# EAGLE board ServoShield_v2_1 (EAGLE 7.5.0)
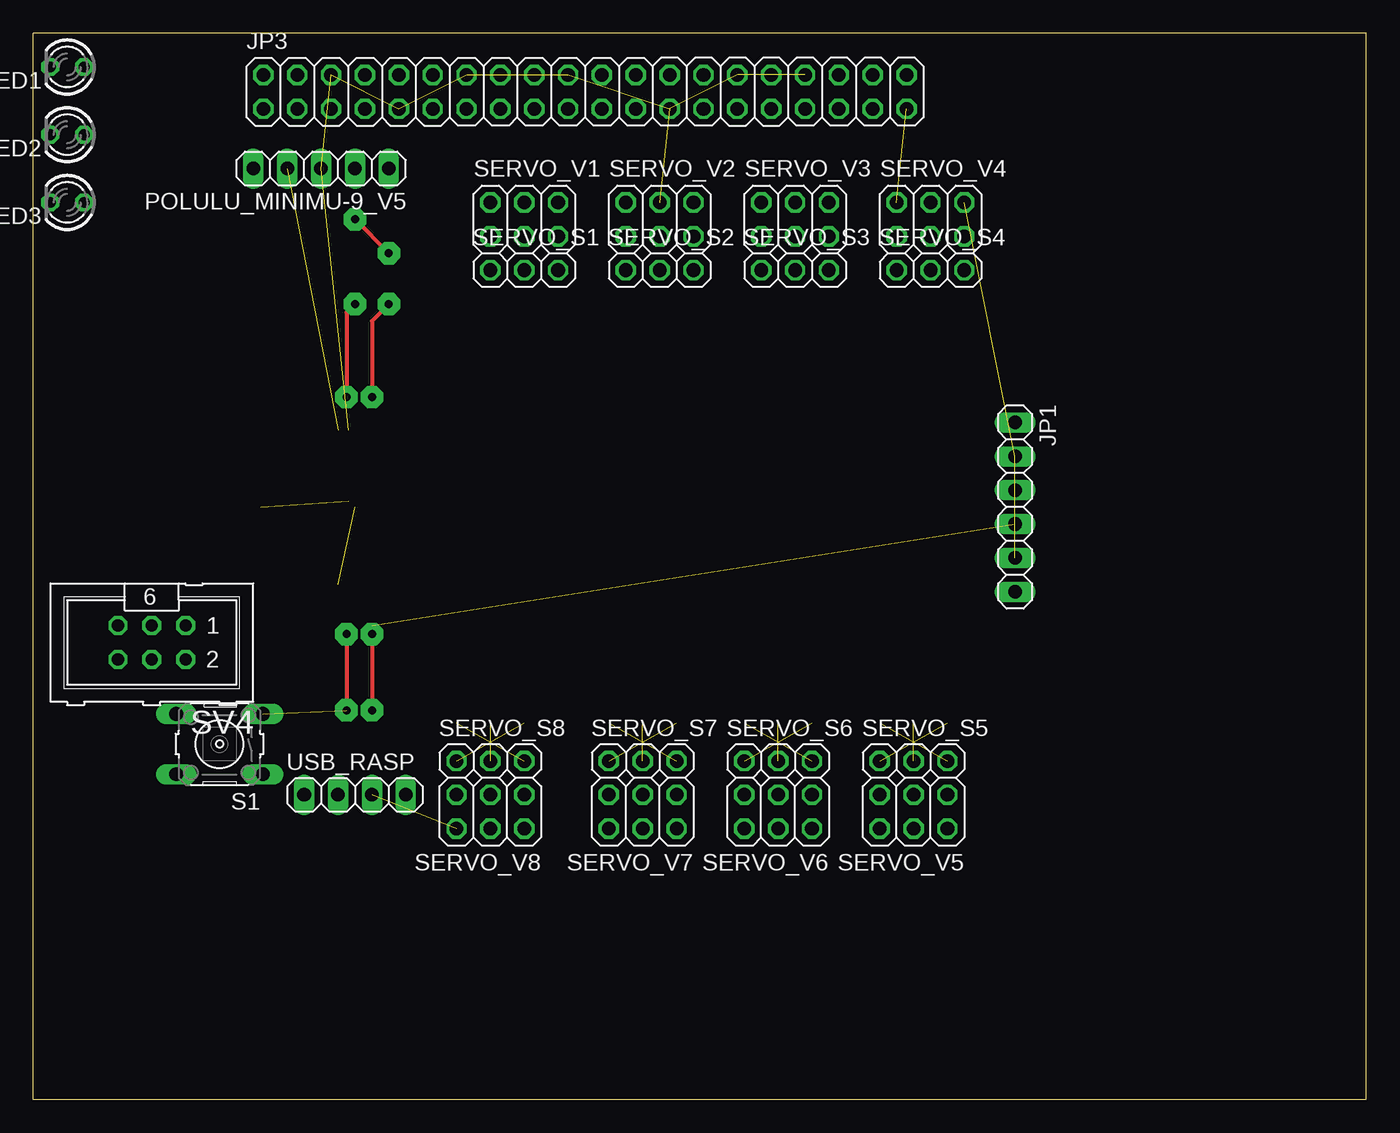
[diagram p0: board, top side]
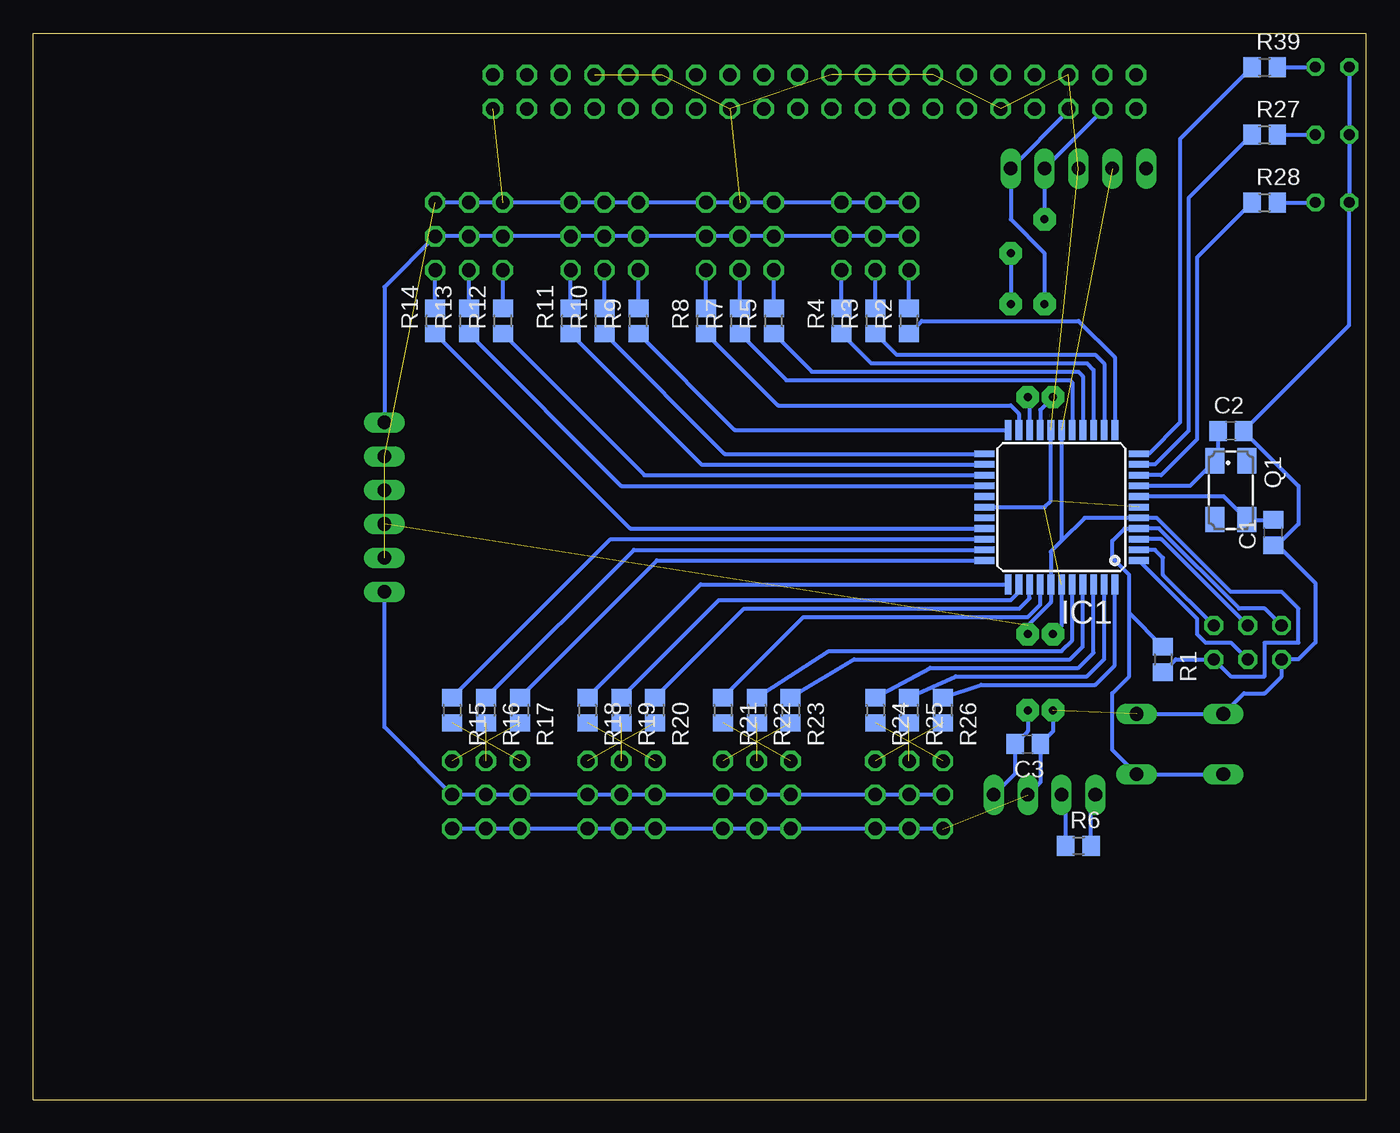
[diagram p1: board, bottom side, seen from below]

Size 100 x 80 mm. Coordinates in mm from the lower left corner, seen from the top.
Outline: 100,0 100,80 0,80 0,0 100,0
Copper layers (1*16): Top 0.035mm / dielectric 1.5mm / Bottom 0.035mm
Design rules "default": minimum track width 10mil, minimum drill 24mil, track to track 8mil, track to pad 8mil, pad to pad 8mil, via to via 8mil, smd to smd 8mil, copper to edge 40mil, drill to drill 8mil, minimum pad ring 10mil, minimum via ring 8mil, stop-mask expansion 4mil, vias tented up to drill 0mil, thermal gap 10mil

## Footprints (pad centres in the part's own frame; a part is rotated, then mirrored left to right if it is on the bottom)
C0805 = smd 1.3 x 1.5: 1 -0.95,0; 2 0.95,0
TQFP44 = smd 1.5 x 0.5: 1 -5.8,4; 2 -5.8,3.2; 3 -5.8,2.4; 4 -5.8,1.6; 5 -5.8,0.8; 6 -5.8,0; 7 -5.8,-0.8; 8 -5.8,-1.6; 9 -5.8,-2.4; 10 -5.8,-3.2; 11 -5.8,-4; 23 5.8,-4; 24 5.8,-3.2; 25 5.8,-2.4; 26 5.8,-1.6; 27 5.8,-0.8; 28 5.8,0; 29 5.8,0.8; 30 5.8,1.6; 31 5.8,2.4; 32 5.8,3.2; 33 5.8,4 | smd 0.5 x 1.5: 12 -4,-5.8; 13 -3.2,-5.8; 14 -2.4,-5.8; 15 -1.6,-5.8; 16 -0.8,-5.8; 17 0,-5.8; 18 0.8,-5.8; 19 1.6,-5.8; 20 2.4,-5.8; 21 3.2,-5.8; 22 4,-5.8; 34 4,5.8; 35 3.2,5.8; 36 2.4,5.8; 37 1.6,5.8; 38 0.8,5.8; 39 0,5.8; 40 -0.8,5.8; 41 -1.6,5.8; 42 -2.4,5.8; 43 -3.2,5.8; 44 -4,5.8
1X06 = drill 1.016 long: 1 -6.35,0; 2 -3.81,0; 3 -1.27,0; 4 1.27,0; 5 3.81,0; 6 6.35,0
2X20 = drill 1.016 octagon: 1 -24.13,-1.27; 2 -24.13,1.27; 3 -21.59,-1.27; 4 -21.59,1.27; 5 -19.05,-1.27; 6 -19.05,1.27; 7 -16.51,-1.27; 8 -16.51,1.27; 9 -13.97,-1.27; 10 -13.97,1.27; 11 -11.43,-1.27; 12 -11.43,1.27; 13 -8.89,-1.27; 14 -8.89,1.27; 15 -6.35,-1.27; 16 -6.35,1.27; 17 -3.81,-1.27; 18 -3.81,1.27; 19 -1.27,-1.27; 20 -1.27,1.27; 21 1.27,-1.27; 22 1.27,1.27; 23 3.81,-1.27; 24 3.81,1.27; 25 6.35,-1.27; 26 6.35,1.27; 27 8.89,-1.27; 28 8.89,1.27; 29 11.43,-1.27; 30 11.43,1.27; 31 13.97,-1.27; 32 13.97,1.27; 33 16.51,-1.27; 34 16.51,1.27; 35 19.05,-1.27; 36 19.05,1.27; 37 21.59,-1.27; 38 21.59,1.27; 39 24.13,-1.27; 40 24.13,1.27
LED3MM = drill 0.813 octagon: A -1.27,0; K 1.27,0
1X05 = drill 1.016 long: 1 -5.08,0; 2 -2.54,0; 3 0,0; 4 2.54,0; 5 5.08,0
CTS406 = smd 1.9 x 1.4: 1 -2.2,-1.2; 2 2.2,-1.2; 3 2.2,1.2; 4 -2.2,1.2
R0805 = smd 1.3 x 1.5: 1 -0.95,0; 2 0.95,0
B3F-10XX = drill 1.016 long: 1 -3.251,2.261; 2 3.251,2.261; 3 -3.251,-2.261; 4 3.251,-2.261
1X03 = drill 1.016 octagon: 1 -2.54,0; 2 0,0; 3 2.54,0
2X03 = drill 1.016 octagon: 1 -2.54,-1.27; 2 -2.54,1.27; 3 0,-1.27; 4 0,1.27; 5 2.54,-1.27; 6 2.54,1.27
ML6 = drill 0.914 octagon: 1 -2.54,-1.27; 2 -2.54,1.27; 3 0,-1.27; 4 0,1.27; 5 2.54,-1.27; 6 2.54,1.27
1X04 = drill 1.016 long: 1 -3.81,0; 2 -1.27,0; 3 1.27,0; 4 3.81,0

## Placement (x,y rotation side)
C1  22pF  [C0805]  6.99,42.55 90 bottom
C2  22pF  [C0805]  10.16,50.16 0 bottom
C3  100nF  [C0805]  25.4,26.67 180 bottom
IC1  ATMEGA644A  [TQFP44]  22.86,44.45 180 bottom
JP1  [1X06]  73.66,44.45 270 top
JP3  [2X20]  41.39,75.61 0 top
LED1  GN_2V  [LED3MM]  2.54,77.47 180 top
LED2  GN_2V  [LED3MM]  2.54,72.39 180 top
LED3  GN_2V  [LED3MM]  2.54,67.31 180 top
POLULU_MINIMU-9_V5  [1X05]  21.59,69.85 180 top
Q1  8MHz  [CTS406]  10.16,45.72 270 bottom
R1  10k  [R0805]  15.24,33.02 270 bottom
R2  220  [R0805]  34.29,58.42 90 bottom
R3  220  [R0805]  36.83,58.42 90 bottom
R4  220  [R0805]  39.37,58.42 90 bottom
R5  220  [R0805]  44.45,58.42 90 bottom
R6  100  [R0805]  21.59,19.05 0 bottom
R7  220  [R0805]  46.99,58.42 90 bottom
R8  220  [R0805]  49.53,58.42 90 bottom
R9  220  [R0805]  54.61,58.42 90 bottom
R10  220  [R0805]  57.15,58.42 90 bottom
R11  220  [R0805]  59.69,58.42 90 bottom
R12  220  [R0805]  64.77,58.42 90 bottom
R13  220  [R0805]  67.31,58.42 90 bottom
R14  220  [R0805]  69.85,58.42 90 bottom
R15  220  [R0805]  68.58,29.21 270 bottom
R16  220  [R0805]  66.04,29.21 270 bottom
R17  220  [R0805]  63.5,29.21 270 bottom
R18  220  [R0805]  58.42,29.21 270 bottom
R19  220  [R0805]  55.88,29.21 270 bottom
R20  220  [R0805]  53.34,29.21 270 bottom
R21  220  [R0805]  48.26,29.21 270 bottom
R22  220  [R0805]  45.72,29.21 270 bottom
R23  220  [R0805]  43.18,29.21 270 bottom
R24  220  [R0805]  36.83,29.21 270 bottom
R25  220  [R0805]  34.29,29.21 270 bottom
R26  220  [R0805]  31.75,29.21 270 bottom
R27  1k5  [R0805]  7.62,72.39 0 bottom
R28  1k5  [R0805]  7.62,67.31 0 bottom
R39  1k5  [R0805]  7.62,77.47 0 bottom
S1  -  [B3F-10XX]  13.97,26.67 180 top
SERVO_S1  [1X03]  36.83,62.23 0 top
SERVO_S2  [1X03]  46.99,62.23 0 top
SERVO_S3  [1X03]  57.15,62.23 0 top
SERVO_S4  [1X03]  67.31,62.23 0 top
SERVO_S5  [1X03]  66.04,25.4 0 top
SERVO_S6  [1X03]  55.88,25.4 0 top
SERVO_S7  [1X03]  45.72,25.4 0 top
SERVO_S8  [1X03]  34.29,25.4 0 top
SERVO_V1  [2X03]  36.83,66.04 0 top
SERVO_V2  [2X03]  46.99,66.04 0 top
SERVO_V3  [2X03]  57.15,66.04 0 top
SERVO_V4  [2X03]  67.31,66.04 0 top
SERVO_V5  [2X03]  66.04,21.59 180 top
SERVO_V6  [2X03]  55.88,21.59 180 top
SERVO_V7  [2X03]  45.72,21.59 180 top
SERVO_V8  [2X03]  34.29,21.59 180 top
SV4  SPI1  [ML6]  8.89,34.29 180 top
USB_RASP  [1X04]  24.13,22.86 0 top

## Library data of the parts
C1 C2 R6 R27 R28 R39 = rcl
C3 R1-R5 R7-R26 = resistor
IC1 = atmel; MPN: ATMEGA644PV-10AU; OC_FARNELL: 1455123; OC_NEWARK: 58M3748
JP1 JP3 POLULU_MINIMU-9_V5 SERVO_V1-SERVO_V8 USB_RASP = pinhead
LED1-LED3 = led
Q1 = crystal; OC_FARNELL: unknown; OC_NEWARK: unknown
S1 = switch-omron; MPN: B3F-1000; OC_FARNELL: 176432; OC_NEWARK: 36M3542
SERVO_S1-SERVO_S8 = pinhead_NEW
SV4 = con-harting-ml; OC_FARNELL: unknown; OC_NEWARK: unknown

## Nets
!RST: IC1.4 R1.1 S1.1 S1.2 SV4.5
+5V/1: JP1.1 SERVO_V1.1 SERVO_V1.3 SERVO_V1.5 SERVO_V2.1 SERVO_V2.3 SERVO_V2.5 SERVO_V3.1 SERVO_V3.3 SERVO_V3.5 SERVO_V4.1 SERVO_V4.3 SERVO_V4.5
+5V/2: JP1.6 SERVO_V5.1 SERVO_V5.3 SERVO_V5.5 SERVO_V6.1 SERVO_V6.3 SERVO_V6.5 SERVO_V7.1 SERVO_V7.3 SERVO_V7.5 SERVO_V8.1 SERVO_V8.3 SERVO_V8.5
AVCC: IC1.27
GND: C1.1 C2.2 C3.1 IC1.6 IC1.18 IC1.28 IC1.39 JP1.2 JP1.3 JP1.5 JP3.6 JP3.9 JP3.14 JP3.20 JP3.25 JP3.30 JP3.34 JP3.39 LED1.K LED2.K LED3.K POLULU_MINIMU-9_V5.3 S1.3 S1.4 SERVO_V1.2 SERVO_V1.4 SERVO_V1.6 SERVO_V2.2 SERVO_V2.4 SERVO_V2.6 SERVO_V3.2 SERVO_V3.4 SERVO_V3.6 SERVO_V4.2 SERVO_V4.4 SERVO_V4.6 SERVO_V5.2 SERVO_V5.4 SERVO_V5.6 SERVO_V6.2 SERVO_V6.4 SERVO_V6.6 SERVO_V7.2 SERVO_V7.4 SERVO_V7.6 SERVO_V8.2 SERVO_V8.4 SERVO_V8.6 SV4.6 USB_RASP.3
LED_1: IC1.9 R28.1
LED_2: IC1.10 R27.1
LED_3: IC1.11 R39.1
MISO: IC1.2 SV4.1
MOSI: IC1.1 SV4.4
N$1: C2.1 IC1.8 Q1.1
N$2: C1.2 IC1.7 Q1.3
N$3: R2.2 SERVO_S1.1
N$4: R3.2 SERVO_S1.2
N$5: R4.2 SERVO_S1.3
N$6: R5.2 SERVO_S2.1
N$7: R7.2 SERVO_S2.2
N$8: R8.2 SERVO_S2.3
N$9: R9.2 SERVO_S3.1
N$10: R10.2 SERVO_S3.2
N$11: R11.2 SERVO_S3.3
N$12: R12.2 SERVO_S4.1
N$13: R13.2 SERVO_S4.2
N$14: R14.2 SERVO_S4.3
N$15: R15.2 SERVO_S5.1
N$16: R16.2 SERVO_S5.2
N$17: R17.2 SERVO_S5.3
N$18: R18.2 SERVO_S6.1
N$19: R19.2 SERVO_S6.2
N$20: R20.2 SERVO_S6.3
N$21: R21.2 SERVO_S7.1
N$22: R22.2 SERVO_S7.2
N$23: R23.2 SERVO_S7.3
N$24: R24.2 SERVO_S8.1
N$25: R25.2 SERVO_S8.2
N$26: R26.2 SERVO_S8.3
N$27: LED2.A R27.2
N$28: LED3.A R28.2
N$29: R6.2 USB_RASP.1
N$33: POLULU_MINIMU-9_V5.5
N$85: LED1.A R39.2
N$86: R6.1 USB_RASP.2
SCK: IC1.3 SV4.3
SCL: IC1.19 JP3.5 POLULU_MINIMU-9_V5.1
SDA: IC1.20 JP3.3 POLULU_MINIMU-9_V5.2
SERVO_1: IC1.12 R2.1
SERVO_2: IC1.13 R3.1
SERVO_3: IC1.14 R4.1
SERVO_4: IC1.15 R5.1
SERVO_5: IC1.16 R7.1
SERVO_6: IC1.21 R8.1
SERVO_7: IC1.22 R9.1
SERVO_8: IC1.23 R10.1
SERVO_9: IC1.24 R11.1
SERVO_10: IC1.25 R12.1
SERVO_11: IC1.26 R13.1
SERVO_12: IC1.30 R14.1
SERVO_13: IC1.31 R15.1
SERVO_14: IC1.32 R16.1
SERVO_15: IC1.33 R17.1
SERVO_16: IC1.34 R18.1
SERVO_17: IC1.35 R19.1
SERVO_18: IC1.36 R20.1
SERVO_19: IC1.37 R21.1
SERVO_20: IC1.40 R22.1
SERVO_21: IC1.41 R23.1
SERVO_22: IC1.42 R24.1
SERVO_23: IC1.43 R25.1
SERVO_24: IC1.44 R26.1
VCC: C3.2 IC1.5 IC1.17 IC1.38 JP1.4 POLULU_MINIMU-9_V5.4 R1.2 SV4.2 USB_RASP.4

## Tracks (layer width: path | path; a pad name or v marks a point on that pad's centre or on a via)
!RST
  Bottom 0.305: SV4.5 7.62,36.83 9.53,36.83 15.54,42.85 IC1.4 18.11,42.85 19.05,41.91 19.05,40.64 17.78,39.37 17.78,36.51 | R1.1 17.78,36.51 | 17.78,36.51 17.78,31.75 19.05,30.48 19.05,26.24 S1.1 S1.2
+5V/1
  Bottom 0.305: SERVO_V1.1 SERVO_V1.3 SERVO_V1.5 SERVO_V2.1 SERVO_V2.3 SERVO_V2.5 SERVO_V3.1 SERVO_V3.3 SERVO_V3.5 SERVO_V4.1 SERVO_V4.3 SERVO_V4.5 73.66,60.96 JP1.1
+5V/2
  Bottom 0.305: SERVO_V8.5 SERVO_V8.3 SERVO_V8.1 SERVO_V7.5 SERVO_V7.3 SERVO_V7.1 SERVO_V6.5 SERVO_V6.3 SERVO_V6.1 SERVO_V5.5 SERVO_V5.3 SERVO_V5.1 73.66,27.94 JP1.6
GND  (via drill 0.6 pad 1.68)  (17 unrouted)
  Top 0.305: v23.5,34.92 v23.5,29.21
  Bottom 0.305: S1.3 S1.4 9.17,30.48 7.62,30.48 6.35,31.75 SV4.6 5.08,33.02 3.81,34.29 3.81,38.74 6.67,41.59 | SERVO_V1.2 SERVO_V1.4 SERVO_V1.6 SERVO_V2.2 SERVO_V2.4 SERVO_V2.6 SERVO_V3.2 SERVO_V3.4 SERVO_V3.6 SERVO_V4.2 SERVO_V4.4 SERVO_V4.6 | SERVO_V8.6 SERVO_V8.4 SERVO_V8.2 SERVO_V7.6 SERVO_V7.4 SERVO_V7.2 SERVO_V6.6 SERVO_V6.4 SERVO_V6.2 SERVO_V5.6 SERVO_V5.4 SERVO_V5.2 | LED1.K LED2.K LED3.K 1.27,58.1 C2.2 5.08,46.03 5.08,43.18 6.67,41.59 | 6.67,41.59 C1.1 | IC1.28 24.13,44.45 23.66,44.92 IC1.18 | IC1.39 22.86,35.56 v23.5,34.92 | v23.5,29.21 23.5,27.62 C3.1 24.45,23.81 USB_RASP.3
LED_1
  Bottom 0.305: R28.1 12.7,63.18 12.7,49.53 15.38,46.85 IC1.9
LED_2
  Bottom 0.305: R27.1 13.34,67.62 13.34,50.16 15.85,47.65 IC1.10
LED_3
  Bottom 0.305: R39.1 13.97,72.07 13.97,50.8 16.32,48.45 IC1.11
MISO
  Bottom 0.305: SV4.1 15.24,39.37 15.24,40.64 15.85,41.25 IC1.2
MOSI
  Bottom 0.305: IC1.1 12.7,36.09 12.7,34.92 12.06,34.29 10.16,34.29 SV4.4
N$1
  Bottom 0.305: IC1.8 13.23,46.05 Q1.1 11.11,48.17 C2.1
N$2
  Bottom 0.305: IC1.7 10.69,45.25 Q1.3 8.94,43.49 C1.2
N$3
  Bottom 0.305: R2.2 SERVO_S1.1
N$4
  Bottom 0.305: R3.2 SERVO_S1.2
N$5
  Bottom 0.305: R4.2 SERVO_S1.3
N$6
  Bottom 0.305: R5.2 SERVO_S2.1
N$7
  Bottom 0.305: R7.2 SERVO_S2.2
N$8
  Bottom 0.305: R8.2 SERVO_S2.3
N$9
  Bottom 0.305: R9.2 SERVO_S3.1
N$10
  Bottom 0.305: R10.2 SERVO_S3.2
N$11
  Bottom 0.305: R11.2 SERVO_S3.3
N$12
  Bottom 0.305: R12.2 SERVO_S4.1
N$13
  Bottom 0.305: R13.2 SERVO_S4.2
N$14
  Bottom 0.305: R14.2 SERVO_S4.3
N$15  (1 unrouted)
N$16  (1 unrouted)
N$17  (1 unrouted)
N$18  (1 unrouted)
N$19  (1 unrouted)
N$20  (1 unrouted)
N$21  (1 unrouted)
N$22  (1 unrouted)
N$23  (1 unrouted)
N$24  (1 unrouted)
N$25  (1 unrouted)
N$26  (1 unrouted)
N$27
  Bottom 0.305: R27.2 LED2.A
N$28
  Bottom 0.305: R28.2 LED3.A
N$29
  Bottom 0.305: R6.2 20.64,22.54 USB_RASP.1
N$85
  Bottom 0.305: R39.2 LED1.A
N$86
  Bottom 0.305: R6.1 22.54,22.54 USB_RASP.2
SCK
  Bottom 0.305: SV4.3 15.38,42.05 IC1.3
SCL  (via drill 0.6 pad 1.68)
  Top 0.305: v24.13,59.69 23.5,59.05 v23.5,52.7
  Bottom 0.305: v24.13,59.69 24.13,63.5 26.67,66.04 POLULU_MINIMU-9_V5.1 22.34,74.18 JP3.5 | v23.5,52.7 24.46,51.74 IC1.19
SDA  (via drill 0.6 pad 1.68)
  Top 0.305: v24.13,66.04 v26.67,63.5 | v26.67,59.69 25.4,58.42 v25.4,52.7
  Bottom 0.305: v24.13,66.04 POLULU_MINIMU-9_V5.2 19.8,74.18 JP3.3 | v26.67,63.5 v26.67,59.69 | v25.4,52.7 25.26,52.56 IC1.20
SERVO_1
  Bottom 0.305: R2.1 33.34,58.42 21.59,58.42 18.86,55.69 IC1.12
SERVO_2
  Bottom 0.305: R3.1 35.24,55.88 20.32,55.88 19.66,55.22 IC1.13
SERVO_3
  Bottom 0.305: R4.1 37.15,55.24 20.95,55.24 20.46,54.75 IC1.14
SERVO_4
  Bottom 0.305: R5.1 41.59,54.61 21.59,54.61 21.26,54.28 IC1.15
SERVO_5
  Bottom 0.305: R7.1 43.49,53.98 22.23,53.98 22.06,53.81 IC1.16
SERVO_6
  Bottom 0.305: R8.1 44.13,52.07 26.67,52.07 26.06,51.46 IC1.21
SERVO_7
  Bottom 0.305: R9.1 47.39,50.25 IC1.22
SERVO_8
  Bottom 0.305: R10.1 48.13,48.45 IC1.23
SERVO_9
  Bottom 0.305: R11.1 49.87,47.65 IC1.24
SERVO_10
  Bottom 0.305: R12.1 54.15,46.85 IC1.25
SERVO_11
  Bottom 0.305: R13.1 55.89,46.05 IC1.26
SERVO_12
  Bottom 0.305: R14.1 55.23,42.85 IC1.30
SERVO_13
  Bottom 0.305: R15.1 56.69,42.05 IC1.31
SERVO_14
  Bottom 0.305: R16.1 54.95,41.25 IC1.32
SERVO_15
  Bottom 0.305: R17.1 53.21,40.45 IC1.33
SERVO_16
  Bottom 0.305: R18.1 49.93,38.65 IC1.34
SERVO_17
  Bottom 0.305: R19.1 48.58,37.47 26.67,37.47 26.06,38.08 IC1.35
SERVO_18
  Bottom 0.305: R20.1 46.67,36.83 26.04,36.83 25.26,37.6 IC1.36
SERVO_19
  Bottom 0.305: R21.1 42.23,36.2 25.4,36.2 24.46,37.13 IC1.37
SERVO_20
  Bottom 0.305: R22.1 40.32,33.66 22.86,33.66 22.06,34.45 IC1.40
SERVO_21
  Bottom 0.305: R23.1 38.41,33.02 22.23,33.02 21.26,33.98 IC1.41
SERVO_22
  Bottom 0.305: R24.1 32.7,32.38 21.59,32.38 20.46,33.52 IC1.42
SERVO_23
  Bottom 0.305: R25.1 30.8,31.75 20.95,31.75 19.66,33.05 IC1.43
SERVO_24
  Bottom 0.305: R26.1 28.89,31.11 20.32,31.11 18.86,32.58 IC1.44
VCC  (via drill 0.6 pad 1.68)  (2 unrouted)
  Top 0.305: v25.4,34.92 v25.4,29.21
  Bottom 0.305: 22.86,41.91 21.12,43.65 IC1.5 15.71,43.65 10.16,38.1 6.35,38.1 5.08,36.83 5.08,34.29 7.62,34.29 7.62,31.75 10.16,31.75 SV4.2 14.29,33.02 R1.2 | 22.86,41.91 23.66,41.11 IC1.38 23.66,37.3 25.4,35.56 v25.4,34.92 | IC1.17 22.86,41.91 | v25.4,29.21 25.4,27.62 C3.2 26.35,24.45 USB_RASP.4